# EAGLE board motor_connector_board (EAGLE 8.5.0)
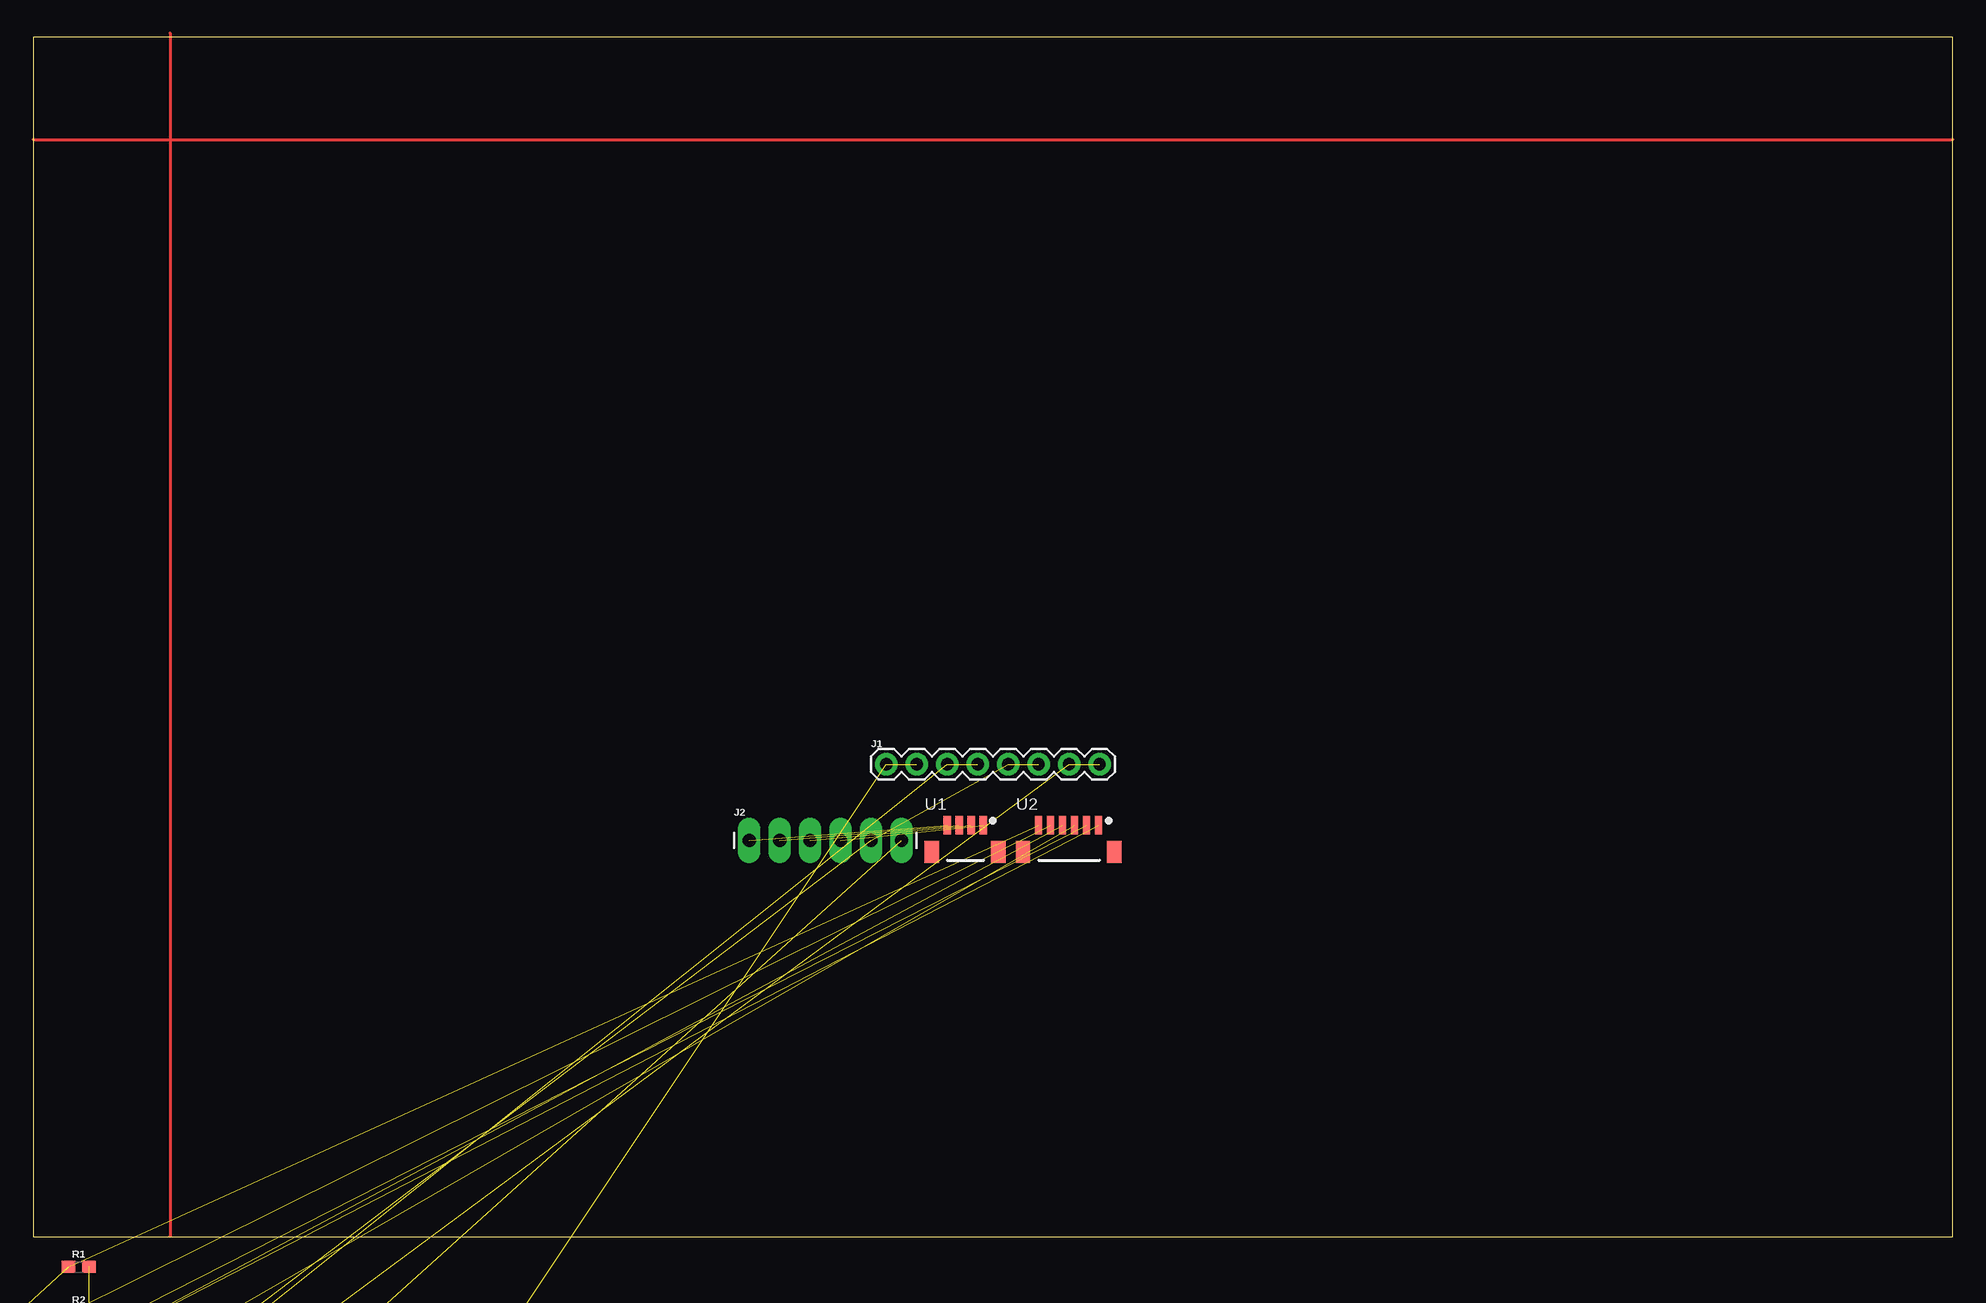
[diagram p0: board, top side]
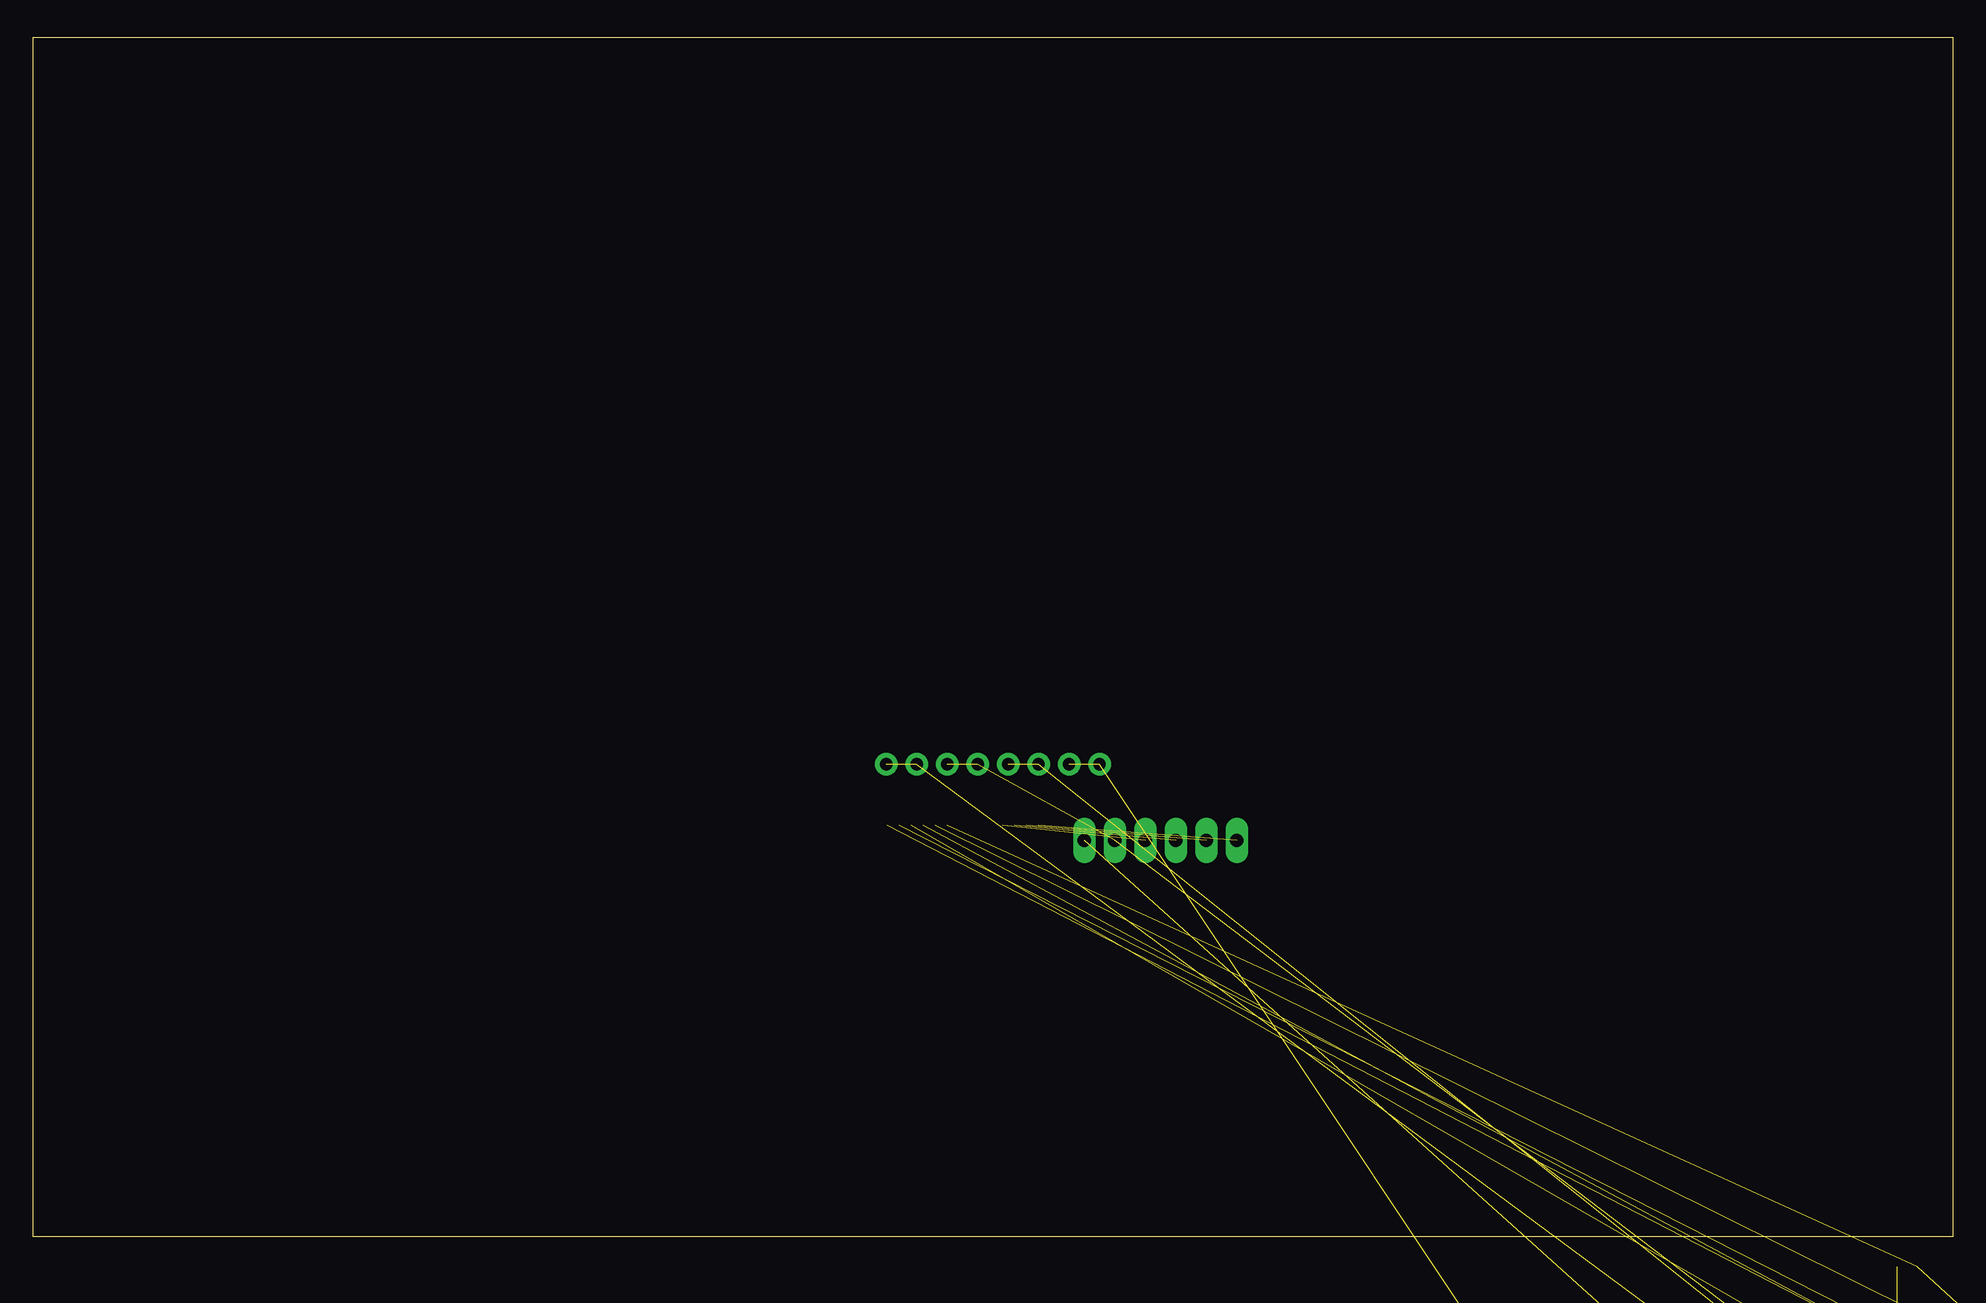
[diagram p1: board, bottom side, seen from below]

Size 160 x 100 mm. Coordinates in mm from the lower left corner, seen from the top.
Outline: 0,0 160,0 160,100 0,100 0,0
Copper layers (1*16): Top 0.035mm / dielectric 1.5mm / Bottom 0.035mm
Design rules "default": minimum track width 6mil, minimum drill 0.35mm, track to track 6mil, track to pad 6mil, pad to pad 6mil, via to via 6mil, smd to smd 6mil, copper to edge 40mil, drill to drill 6mil, minimum pad ring 10mil, minimum via ring 8mil, stop-mask expansion 4mil, vias tented up to drill 0mil, thermal gap 10mil
Net classes: 0 default: width 0.152 mm, drill 0.254 mm, clearance 0.152 mm; 1 ground: width 0.152 mm, drill 0.254 mm, clearance 0.152 mm; 3 power: width 0.152 mm, drill 0.254 mm, clearance 0.152 mm

## Footprints (pad centres in the part's own frame; a part is rotated, then mirrored left to right if it is on the bottom)
0603 = smd 1.1 x 1: 1 -0.85,0; 2 0.85,0
1X08 = drill 1.016 pad 1.88: 1 0,0; 2 2.54,0; 3 5.08,0; 4 7.62,0; 5 10.16,0; 6 12.7,0; 7 15.24,0; 8 17.78,0
1X06_LONGPADS = drill 1.118 pad 1.88 long: 1 0,0; 2 2.54,0; 3 5.08,0; 4 7.62,0; 5 10.16,0; 6 12.7,0
2X5-SHROUDED_LOCK = drill 1.016 pad 1.88: 1 -1.397,5.08; 2 1.397,5.08; 3 -1.397,2.54; 4 1.397,2.54; 5 -1.397,0; 6 1.397,0; 7 -1.397,-2.54; 8 1.397,-2.54; 9 -1.397,-5.08; 10 1.397,-5.08
1X07 = drill 1.016 pad 1.88: 1 0,0; 2 2.54,0; 3 5.08,0; 4 7.62,0; 5 10.16,0; 6 12.7,0; 7 15.24,0
JST_SH_4_SMD = smd 0.6 x 1.55: 1 0.46,1.27; 2 -0.54,1.27; 3 -1.54,1.27; 4 -2.54,1.27 | smd 1.2 x 1.8: P$1 -3.84,-0.955; P$2 1.728,-0.955
JST_SH_6 = smd 0.6 x 1.55: 1 5,0; 2 4,0; 3 3,0; 4 2,0; 5 1,0; 6 0,0 | smd 1.2 x 1.8: P$1 -1.3,-2.225; P$2 6.3,-2.225
MOLEX_ULTRAFIT-2CKT = drill 1.02 long: + 0,0; - 3.5,0 | hole 3.05: 1.75,-7.91
ACS_CURRENT_SENSOR = drill 1.016 pad 1.88: 1 0,-10.16; 2 0,-7.62; 3 0,-5.08; 4 0,-2.54; 5 0,0; IN-1 12.7,-3.81; IN-2 14.986,-3.302; IN-3 17.018,-2.54; OUT-1 12.7,-6.35; OUT-2 14.986,-6.858; OUT-3 17.018,-7.62

## Placement (x,y rotation side)
C1  0.1uF  [0603]  3.81,-17.78 0 top  (outside the outline)
FRAME1  FRAME-LEDGER  [CREATIVE_COMMONS]  82.55,6.35 0 top
J1  [1X08]  71.12,39.37 0 top
J2  [1X06_LONGPADS]  59.69,33.02 0 top
J10  [2X5-SHROUDED_LOCK]  -30.48,-31.75 0 top  (outside the outline)
J11  [1X07]  10.16,-29.21 0 top  (outside the outline)
J12  [2X5-SHROUDED_LOCK]  -52.07,-31.75 0 top  (outside the outline)
R1  0  [0603]  3.81,-2.54 0 top
R2  0  [0603]  3.81,-6.35 0 top  (outside the outline)
R3  0  [0603]  3.81,-10.16 0 top  (outside the outline)
R4  0  [0603]  3.81,-13.97 0 top  (outside the outline)
U1  JST_SH_4  [JST_SH_4_SMD]  78.74,33.02 0 top
U2  JST_SH_6  [JST_SH_6]  83.82,34.29 0 top
U3  JST_SH_6  [JST_SH_6]  2.54,-41.91 0 top  (outside the outline)
U4  MOLEX_ULTRAFIT  [MOLEX_ULTRAFIT-2CKT]  -11.43,-33.02 0 top  (outside the outline)
U$1  ACS711EX  [ACS_CURRENT_SENSOR]  -53.34,-57.15 0 top  (outside the outline)

## Library data of the parts
C1 = SparkFun-Capacitors; PROD_ID: CAP-07886
FRAME1 = SparkFun-Aesthetics
J1 = SparkFun-Connectors; PROD_ID: CONN-08438
J2 J11 = SparkFun-Connectors
J10 J12 = SparkFun-Connectors; PROD_ID: CONN-08671; SF_ID: PRT-08506
R1-R4 = SparkFun-Resistors; PROD_ID: RES-08609
U1-U3 = Strawson_Eagle_Lib
U4 U$1 = WallE_Motor_Board

## Nets
ACS_GND: J10.2 J12.2 U2.1 U$1.1 U$1.2
ACS_OUT: R1.2 R2.2 R3.2 R4.2 U$1.4
ACS_VCC: J10.1 J12.1 U2.2 U$1.3
AIN0: J10.3 J12.3 J12.5 R4.1 U2.3
AIN1: J10.4 J12.4 R3.1 U2.4
AIN2: J10.5 R2.1 U2.5
AIN3: J10.6 J12.6 R1.1 U2.6
ENC_A: J2.2 U1.3
ENC_B: J2.1 U1.4
ENC_GND: J2.4 U1.1
ENC_VCC: J2.3 U1.2
GND: J1.1 J1.2 J11.7 U3.1 U4.-
MOTORA: J2.6 U$1.OUT-1 U$1.OUT-2 U$1.OUT-3
MOTORB: C1.1 J1.5 J1.6 J2.5
MOTOROUTA: C1.2 J1.3 J1.4 U$1.IN-1 U$1.IN-2 U$1.IN-3
SMC_ERR: J10.8 J11.2 J12.8 U3.3
SMC_RST: J10.7 J11.3 J12.7 U3.4
SMC_RX: J11.5
SMC_TX: J11.4
SMC_TXIN: J11.1
VIN: J1.7 J1.8 U4.+

## Tracks (layer width: path | path; a pad name or v marks a point on that pad's centre or on a via)
ACS_GND  (4 unrouted)
ACS_OUT  (4 unrouted)
ACS_VCC  (3 unrouted)
AIN0  (4 unrouted)
AIN1  (3 unrouted)
AIN2  (2 unrouted)
AIN3  (3 unrouted)
ENC_A  (1 unrouted)
ENC_B  (1 unrouted)
ENC_GND  (1 unrouted)
ENC_VCC  (1 unrouted)
GND  (4 unrouted)
MOTORA  (3 unrouted)
MOTORB  (3 unrouted)
MOTOROUTA  (5 unrouted)
N$1
  Top 0.254: 0,91.44 160.02,91.44
N$2
  Top 0.254: 11.43,100.33 11.43,0
SMC_ERR  (3 unrouted)
SMC_RST  (3 unrouted)
VIN  (2 unrouted)